# EAGLE board Sensor Monitoring System with LCD Display (EAGLE 9.7.0)

Size 191.91 x 115.41 mm. Coordinates in mm from the lower left corner, seen from the top.
Outline: 0,0 191.91,0 191.91,115.41 0,115.41 0,0
Copper layers (1*16): Top 0.035mm / dielectric 1.5mm / Bottom 0.035mm
Design rules "default": minimum track width 6mil, minimum drill 0.35mm, track to track 6mil, track to pad 6mil, pad to pad 6mil, via to via 6mil, smd to smd 6mil, copper to edge 40mil, drill to drill 6mil, minimum pad ring 10mil, minimum via ring 8mil, stop-mask expansion 4mil, vias tented up to drill 0mil, thermal gap 10mil

## Footprints (pad centres in the part's own frame; a part is rotated, then mirrored left to right if it is on the bottom)
LEDRD254W60D565H860B = drill 0.981 pad 1.581: 1 -1.27,0; 2 1.27,0
GL5528 = drill 0.8 pad 1.4: 1 -1.702,0; 2 1.702,0
RESAD1016W63L850D250B = drill 0.83 pad 1.43: 1 -5.08,0; 2 5.08,0
HA-06-SM065 = drill 1 pad 1.676: 1 -2.54,-2.54; 2 0,2.54; 3 2.54,-2.54
TO92 = drill 0.813 octagon: 1 -1.27,0; 2 0,1.905; 3 1.27,0
JHD-162A = drill 1.016 long: 1 -19.05,0; 2 -16.51,0; 3 -13.97,0; 4 -11.43,0; 5 -8.89,0; 6 -6.35,0; 7 -3.81,0; 8 -1.27,0; 9 1.27,0; 10 3.81,0; 11 6.35,0; 12 8.89,0; 13 11.43,0; 14 13.97,0; 15 16.51,0; 16 19.05,0
ARDUINO-UNO-R3-SHIELD = drill 1.016 pad 1.88: 3.3V 24.13,-2.54; 5V 24.13,0; A0 24.13,12.7; A1 24.13,15.24; A2 24.13,17.78; A3 24.13,20.32; A4 24.13,22.86; A5 24.13,25.4; AREF -24.13,-13.97; D2 -24.13,20.32; D3 -24.13,17.78; D4 -24.13,15.24; D5 -24.13,12.7; D6 -24.13,10.16; D7 -24.13,7.62; D8 -24.13,3.81; D9 -24.13,1.27; D10 -24.13,-1.27; D11 -24.13,-3.81; D12 -24.13,-6.35; D13 -24.13,-8.89; GND@0 24.13,2.54; GND@1 24.13,5.08; GND@2 -24.13,-11.43; IOREF 24.13,-7.62; NC 24.13,-10.16; RES 24.13,-5.08; RX -24.13,25.4; SCL -24.13,-19.05; SDA -24.13,-16.51; TX -24.13,22.86; VIN 24.13,7.62

## Placement (x,y rotation side)
D1  RED  [LEDRD254W60D565H860B]  93.1,21.26 180 top
R1  PHOTOCELL_GL5528  [GL5528]  60.08,16.18 0 top
R2  10k  [RESAD1016W63L850D250B]  74.05,16.18 0 top
R3  220  [RESAD1016W63L850D250B]  101.99,16.18 180 top
R4  220  [RESAD1016W63L850D250B]  81.67,11.1 180 top
RPOT1  10k  [HA-06-SM065]  84.21,36.5 0 top
U1  TMP36GT9Z_TO92  [TO92]  35.95,13.64 0 top
U2  LCD-16X2JHD-162A  [JHD-162A]  136.28,36.63 0 top
UMIRCROCONTROLLER  ARDUINO-UNO-R3-SHIELD  [ARDUINO-UNO-R3-SHIELD]  47.88,85.57 270 top

## Library data of the parts
D1 = Tinkercad; CATEGORY: Opto-Electronic; SUB-CATEGORY: LED; VALUE: LED_RED
R1-R4 RPOT1 U1 U2 UMIRCROCONTROLLER = Tinkercad

## Nets
D1_A: D1.1 R3.2
U2_LED+: R4.1 U2.15
U2_VO: RPOT1.2 U2.3
UMIRCROCONTROLLER_5V: R1.1 R4.2 RPOT1.3 U1.3 U2.2 UMIRCROCONTROLLER.5V
UMIRCROCONTROLLER_A0: U1.2 UMIRCROCONTROLLER.A0
UMIRCROCONTROLLER_A1: R1.2 R2.1 UMIRCROCONTROLLER.A1
UMIRCROCONTROLLER_D2: U2.14 UMIRCROCONTROLLER.D2
UMIRCROCONTROLLER_D3: U2.13 UMIRCROCONTROLLER.D3
UMIRCROCONTROLLER_D4: U2.12 UMIRCROCONTROLLER.D4
UMIRCROCONTROLLER_D5: U2.11 UMIRCROCONTROLLER.D5
UMIRCROCONTROLLER_D6: U2.6 UMIRCROCONTROLLER.D6
UMIRCROCONTROLLER_D7: U2.4 UMIRCROCONTROLLER.D7
UMIRCROCONTROLLER_D8: R3.1 UMIRCROCONTROLLER.D8
UMIRCROCONTROLLER_GND: D1.2 R2.2 RPOT1.1 U1.1 U2.1 U2.5 U2.16 UMIRCROCONTROLLER.GND@0 UMIRCROCONTROLLER.GND@1 UMIRCROCONTROLLER.GND@2

## Tracks (layer width: path | path; a pad name or v marks a point on that pad's centre or on a via)
D1_A  (1 unrouted)
U2_LED+  (1 unrouted)
U2_VO  (1 unrouted)
UMIRCROCONTROLLER_5V  (5 unrouted)
UMIRCROCONTROLLER_A0  (1 unrouted)
UMIRCROCONTROLLER_A1  (2 unrouted)
UMIRCROCONTROLLER_D2  (1 unrouted)
UMIRCROCONTROLLER_D3  (1 unrouted)
UMIRCROCONTROLLER_D4  (1 unrouted)
UMIRCROCONTROLLER_D5  (1 unrouted)
UMIRCROCONTROLLER_D6  (1 unrouted)
UMIRCROCONTROLLER_D7  (1 unrouted)
UMIRCROCONTROLLER_D8  (1 unrouted)
UMIRCROCONTROLLER_GND  (9 unrouted)